# Altium PCB AT89S52继电器工控板.PCBDOC (part 2 of 2)
Units mm, origin at the board's own origin, x right, y up, seen from the top; angles counter-clockwise.
Board outline 172.85 x 146.43 mm, 2 copper layers (Top Layer, Bottom Layer); 86 components, 100 nets, 301 pads, 6 vias.
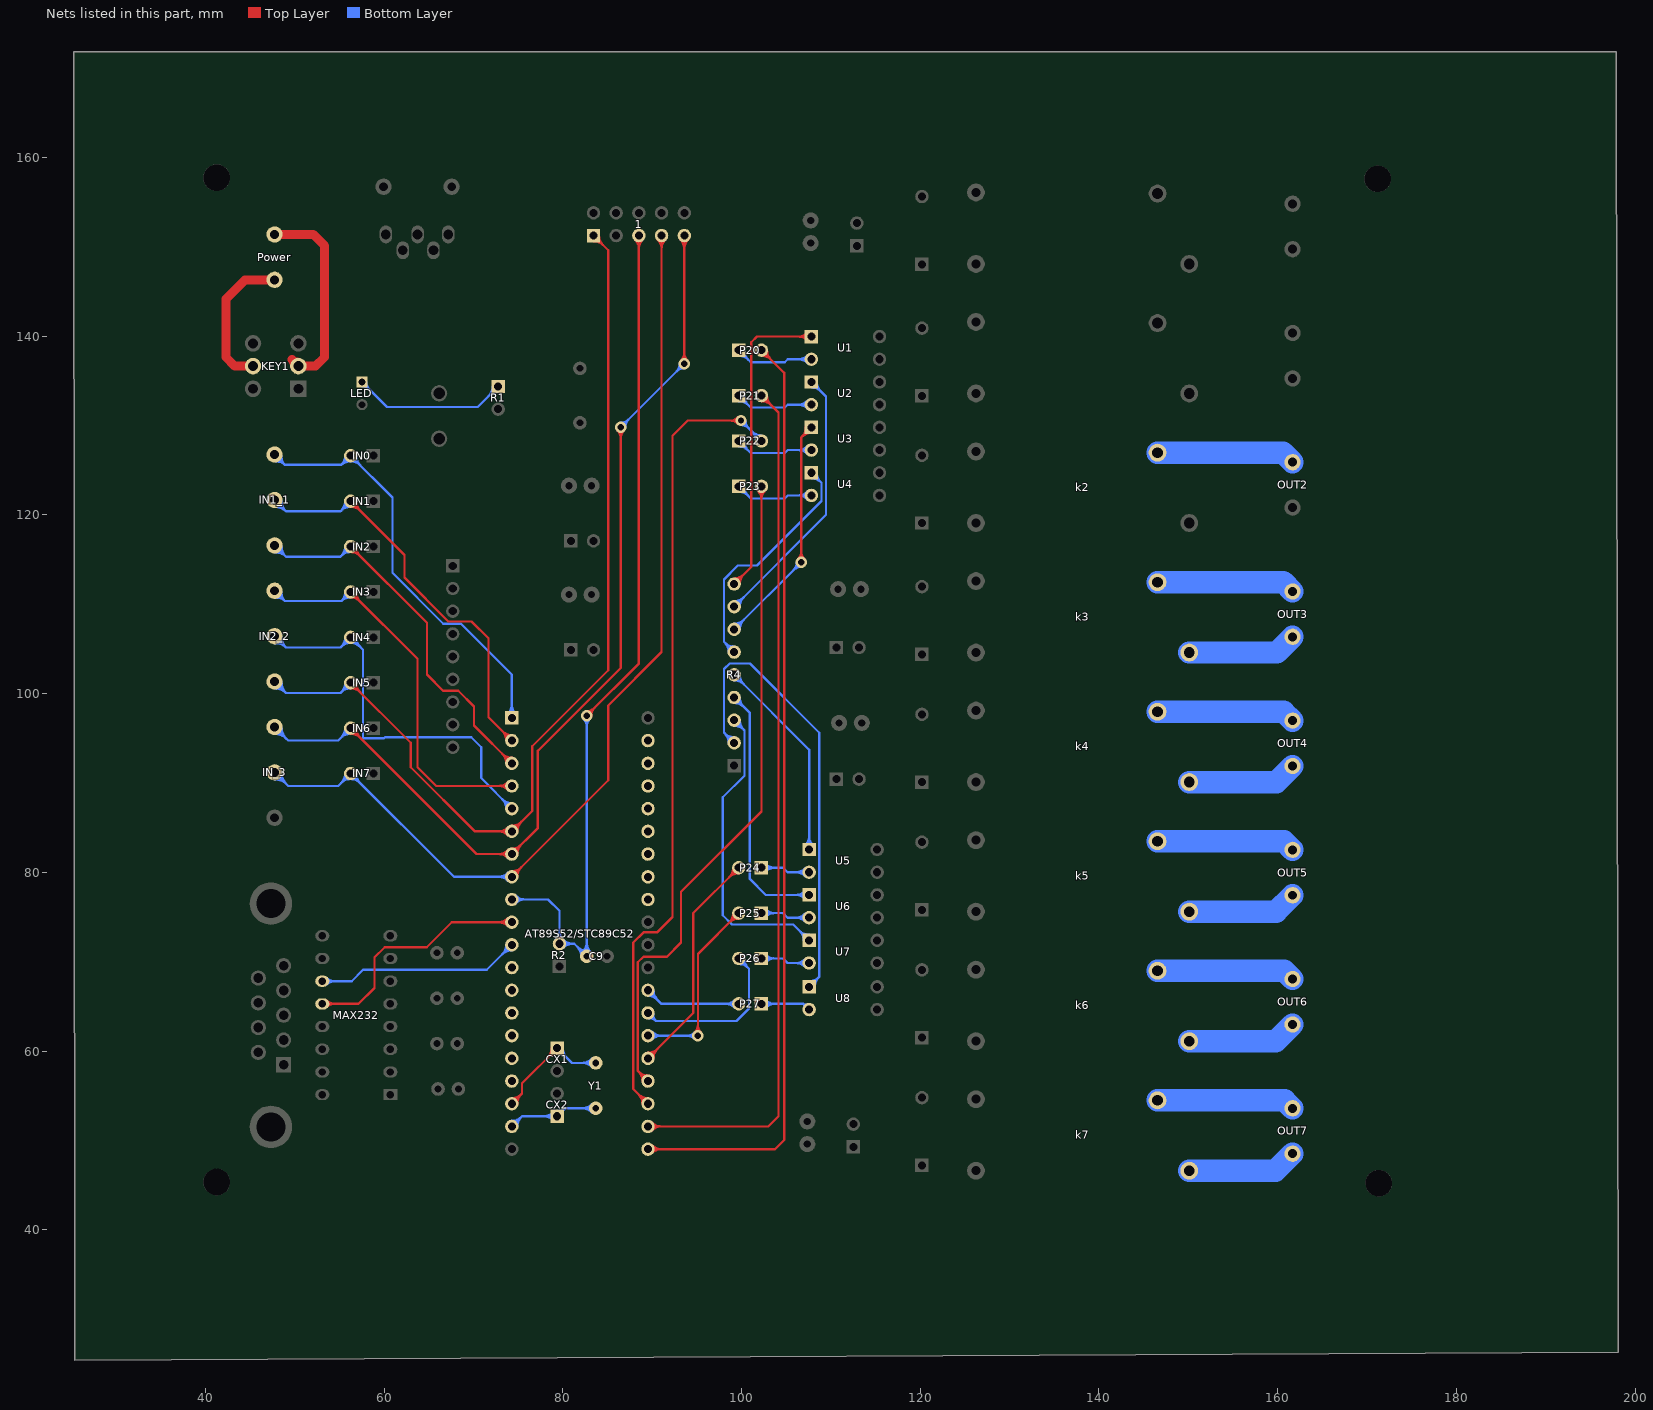
[diagram p2: the nets of this part, all layers, seen from the top]

## Via types
v1: diameter 1.27, hole 0.711, Top Layer to Bottom Layer, 6 vias

## Nets (pads, with @x,y where several pads share a name; then routed paths per layer and width w, separated by ;. In a path a pad name is that pad's centre, name@x,y a point inside that pad or via, vN(x,y) a via of type N, cw(c..) or ccw(c..) an arc to the next point about the centre after c; other vN are vias at no path point) (continued)
Netk2_4: k2.4 OUT2.2 | length 15.6
  Bottom Layer w2.5: k2.4@146.558,126.964 160.601,126.964 OUT2.2@161.671,125.893
Netk3_3: k3.3 OUT3.1 | length 12.3
  Bottom Layer w2.5: k3.3@150.114,104.594 159.911,104.594 OUT3.1@161.671,106.353
Netk3_4: k3.4 OUT3.2 | length 15.5
  Bottom Layer w2.5: k3.4@146.558,112.468 160.637,112.468 OUT3.2@161.671,111.433
Netk4_3: k4.3 OUT4.1 | length 12.3
  Bottom Layer w2.5: k4.3@150.114,90.097 159.875,90.097 OUT4.1@161.671,91.894
Netk4_4: k4.4 OUT4.2 | length 15.5
  Bottom Layer w2.5: k4.4@146.558,97.971 160.673,97.971 OUT4.2@161.671,96.974
Netk5_3: k5.3 OUT5.1 | length 12.3
  Bottom Layer w2.5: k5.3@150.114,75.601 159.839,75.601 OUT5.1@161.671,77.434
Netk5_4: k5.4 OUT5.2 | length 15.5
  Bottom Layer w2.5: k5.4@146.558,83.475 160.709,83.475 OUT5.2@161.671,82.514
Netk6_3: k6.3 OUT6.1 | length 12.3
  Bottom Layer w2.5: k6.3@150.114,61.105 159.802,61.105 OUT6.1@161.671,62.974
Netk6_4: k6.4 OUT6.2 | length 15.5
  Bottom Layer w2.5: k6.4@146.558,68.979 160.746,68.979 OUT6.2@161.671,68.054
Netk7_3: k7.3 OUT7.1 | length 12.3
  Bottom Layer w2.5: k7.3@150.114,46.609 159.766,46.609 OUT7.1@161.671,48.514
Netk7_4: k7.4 OUT7.2 | length 15.5
  Bottom Layer w2.5: k7.4@146.558,54.483 160.782,54.483 OUT7.2@161.671,53.594
NetKEY1_1: KEY1.1 Power.1 | length 23.5
  Top Layer w1: Power.1@47.752,151.384 52.07,151.384 53.34,150.114 53.34,137.668 52.324,136.652 KEY1.1@50.419,136.652 ; KEY1.1@49.994,136.652 ccw(c48.968,136.652) 49.693,137.378 ccw(c50.419,138.103) KEY1.1@50.419,137.077
NetKEY1_6: KEY1.5 Power.2 | length 16.3
  Top Layer w1: KEY1.5@45.339,136.652 43.307,136.652 42.291,137.668 42.291,144.145 44.45,146.304 Power.2@47.752,146.304
NetLED_1: LED.1 R1.1 | length 23
  Bottom Layer w0.254: LED.1@57.531,134.376 cw(c57.531,133.174) 58.381,134.024 cw(c59.231,134.874) LED.1@58.029,134.874 ; LED.1@57.531,134.874 60.325,132.08 70.485,132.08 R1.1@72.771,134.366 ; R1.1@72.148,134.366 cw(c70.644,134.366) 71.707,133.302 cw(c72.771,132.239) R1.1@72.771,133.743 ; R1.1@72.402,134.366 cw(c71.511,134.366) 72.141,133.736 cw(c72.771,133.106) R1.1@72.771,133.997
NetP20_1: P20.1 U1.2 | length 16.3
  Bottom Layer w0.254: P20.1@99.695,137.807 cw(c99.695,136.303) 100.759,137.366 cw(c101.822,138.43) P20.1@100.318,138.43 ; P20.1@99.695,138.061 cw(c99.695,137.17) 100.325,137.8 cw(c100.955,138.43) P20.1@100.064,138.43 ; P20.1@99.695,138.43 101.041,137.084 104.851,137.084 105.181,137.414 U1.2@107.823,137.414 ; U1.2@107.382,136.973 ccw(c106.319,135.91) 106.319,137.414 ccw(c106.319,138.918) U1.2@107.382,137.855 ; U1.2@107.562,137.153 ccw(c106.932,136.523) 106.932,137.414 ccw(c106.932,138.305) U1.2@107.562,137.675
NetP21_1: P21.1 U2.2 | length 16.3
  Bottom Layer w0.254: P21.1@99.695,132.727 cw(c99.695,131.223) 100.759,132.286 cw(c101.822,133.35) P21.1@100.318,133.35 ; P21.1@99.695,132.981 cw(c99.695,132.09) 100.325,132.72 cw(c100.955,133.35) P21.1@100.064,133.35 ; P21.1@99.695,133.35 101.041,132.004 104.851,132.004 105.181,132.334 U2.2@107.823,132.334 ; U2.2@107.382,131.893 ccw(c106.319,130.83) 106.319,132.334 ccw(c106.319,133.838) U2.2@107.382,132.775 ; U2.2@107.562,132.073 ccw(c106.932,131.443) 106.932,132.334 ccw(c106.932,133.225) U2.2@107.562,132.595
NetP22_1: P22.1 U3.2 | length 16.3
  Bottom Layer w0.254: P22.1@99.695,127.647 cw(c99.695,126.143) 100.759,127.206 cw(c101.822,128.27) P22.1@100.318,128.27 ; P22.1@99.695,127.901 cw(c99.695,127.01) 100.325,127.64 cw(c100.955,128.27) P22.1@100.064,128.27 ; P22.1@99.695,128.27 101.041,126.924 104.851,126.924 105.181,127.254 U3.2@107.823,127.254 ; U3.2@107.382,126.813 ccw(c106.319,125.75) 106.319,127.254 ccw(c106.319,128.758) U3.2@107.382,127.695 ; U3.2@107.562,126.993 ccw(c106.932,126.363) 106.932,127.254 ccw(c106.932,128.145) U3.2@107.562,127.515
NetP23_1: P23.1 U4.2 | length 16.3
  Bottom Layer w0.254: P23.1@99.695,122.567 cw(c99.695,121.063) 100.759,122.126 cw(c101.822,123.19) P23.1@100.318,123.19 ; P23.1@99.695,122.821 cw(c99.695,121.93) 100.325,122.56 cw(c100.955,123.19) P23.1@100.064,123.19 ; P23.1@99.695,123.19 101.041,121.844 104.851,121.844 105.181,122.174 U4.2@107.823,122.174 ; U4.2@107.382,121.733 ccw(c106.319,120.67) 106.319,122.174 ccw(c106.319,123.678) U4.2@107.382,122.615 ; U4.2@107.562,121.913 ccw(c106.932,121.283) 106.932,122.174 ccw(c106.932,123.065) U4.2@107.562,122.435
NetP24_1: P24.1 U5.2 | length 13.1
  Bottom Layer w0.254: P24.1@102.235,80.518 104.648,80.518 105.156,80.01 U5.2@107.569,80.01 ; P24.1@102.496,80.257 cw(c103.126,79.627) 103.126,80.518 cw(c103.126,81.409) P24.1@102.496,80.779 ; P24.1@102.676,80.077 cw(c103.739,79.014) 103.739,80.518 cw(c103.739,82.022) P24.1@102.676,80.959 ; U5.2@107.128,79.569 ccw(c106.065,78.506) 106.065,80.01 ccw(c106.065,81.514) U5.2@107.128,80.451 ; U5.2@107.308,79.749 ccw(c106.678,79.119) 106.678,80.01 ccw(c106.678,80.901) U5.2@107.308,80.271
NetP25_1: P25.1 U6.2 | length 13.1
  Bottom Layer w0.254: P25.1@102.235,75.438 104.648,75.438 105.156,74.93 U6.2@107.569,74.93 ; P25.1@102.496,75.177 cw(c103.126,74.547) 103.126,75.438 cw(c103.126,76.329) P25.1@102.496,75.699 ; P25.1@102.676,74.997 cw(c103.739,73.934) 103.739,75.438 cw(c103.739,76.942) P25.1@102.676,75.879 ; U6.2@107.128,74.489 ccw(c106.065,73.426) 106.065,74.93 ccw(c106.065,76.434) U6.2@107.128,75.371 ; U6.2@107.308,74.669 ccw(c106.678,74.039) 106.678,74.93 ccw(c106.678,75.821) U6.2@107.308,75.191
NetP26_1: P26.1 U7.2 | length 13.1
  Bottom Layer w0.254: P26.1@102.235,70.358 104.648,70.358 105.156,69.85 U7.2@107.569,69.85 ; P26.1@102.496,70.097 cw(c103.126,69.467) 103.126,70.358 cw(c103.126,71.249) P26.1@102.496,70.619 ; P26.1@102.676,69.917 cw(c103.739,68.854) 103.739,70.358 cw(c103.739,71.862) P26.1@102.676,70.799 ; U7.2@107.128,69.409 ccw(c106.065,68.346) 106.065,69.85 ccw(c106.065,71.354) U7.2@107.128,70.291 ; U7.2@107.308,69.589 ccw(c106.678,68.959) 106.678,69.85 ccw(c106.678,70.741) U7.2@107.308,70.111
NetP27_1: P27.1 U8.2 | length 10.2
  Bottom Layer w0.254: P27.1@102.235,65.278 106.934,65.278 ; P27.1@102.496,65.017 cw(c103.126,64.387) 103.126,65.278 cw(c103.126,66.169) P27.1@102.496,65.539 ; P27.1@102.676,64.837 cw(c103.739,63.774) 103.739,65.278 cw(c103.739,66.782) P27.1@102.676,65.719 ; U8.2@107.002,64.901 ccw(c106.697,65.041) 106.934,65.278 ; U8.2@107.311,65.21 cw(c107.171,65.515) 106.934,65.278 ; U8.2@107.569,64.643 106.934,65.278
P0.0: AT89S52/STC89C52.39
P0.1: AT89S52/STC89C52.38
P0.2: AT89S52/STC89C52.37
P0.3: AT89S52/STC89C52.36
P0.4: AT89S52/STC89C52.35
P0.5: AT89S52/STC89C52.34
P0.6: AT89S52/STC89C52.33
P0.7: AT89S52/STC89C52.32
P1.0: AT89S52/STC89C52.1 IN0.2 IN1_1.1 | length 62.3
  Bottom Layer w0.254: IN1_1.1@47.752,126.746 48.895,125.603 ; IN1_1.1@47.815,126.219 cw(c47.917,125.365) 48.525,125.973 cw(c49.133,126.581) IN1_1.1@48.279,126.683 ; IN1_1.1@47.845,125.967 cw(c47.996,124.704) 48.895,125.603 ; IN1_1.1@48.531,126.653 ccw(c49.794,126.502) 48.895,125.603 ; IN0.2@55.638,126.599 cw(c54.294,126.554) 55.245,125.603 ; IN0.2@55.892,126.607 cw(c55.096,126.581) 55.659,126.017 cw(c56.223,125.454) IN0.2@56.249,126.25 ; IN0.2@56.241,125.996 ccw(c56.196,124.652) 55.245,125.603 ; IN0.2@56.261,125.996 cw(c56.261,124.492) 57.325,125.555 cw(c58.388,126.619) IN0.2@56.884,126.619 ; IN0.2@56.261,126.25 cw(c56.261,125.359) 56.891,125.989 cw(c57.521,126.619) IN0.2@56.63,126.619 ; AT89S52/STC89C52.1@73.854,97.723 ccw(c72.791,98.786) 74.295,98.786 ccw(c75.799,98.786) AT89S52/STC89C52.1@74.736,97.723 ; AT89S52/STC89C52.1@74.034,97.543 ccw(c73.404,98.173) 74.295,98.173 ccw(c75.186,98.173) AT89S52/STC89C52.1@74.556,97.543 ; AT89S52/STC89C52.1@74.295,97.282 74.295,102.133 68.605,107.823 66.624,107.823 60.935,113.513 60.935,121.945 IN0.2@56.261,126.619 55.245,125.603 ; 48.895,125.603 55.245,125.603
P1.1: AT89S52/STC89C52.2 IN1.2 IN1_1.2 | length 61.2
  Top Layer w0.254: IN1.2@56.261,120.916 cw(c56.261,119.412) 57.325,120.475 cw(c58.388,121.539) IN1.2@56.884,121.539 ; IN1.2@56.261,121.17 cw(c56.261,120.279) 56.891,120.909 cw(c57.521,121.539) IN1.2@56.63,121.539 ; IN1.2@56.261,121.539 62.281,115.519 62.281,112.979 67.183,108.077 69.799,108.077 71.684,106.192 71.684,97.353 AT89S52/STC89C52.2@74.295,94.742 ; AT89S52/STC89C52.2@73.672,94.742 ccw(c72.168,94.742) 73.231,95.806 ccw(c74.295,96.869) AT89S52/STC89C52.2@74.295,95.365 ; AT89S52/STC89C52.2@73.926,94.742 ccw(c73.035,94.742) 73.665,95.372 ccw(c74.295,96.002) AT89S52/STC89C52.2@74.295,95.111
  Bottom Layer w0.254: IN1_1.2@47.752,121.666 49.022,120.396 ; IN1_1.2@47.773,121.135 cw(c47.816,120.012) 48.611,120.807 cw(c49.406,121.602) IN1_1.2@48.283,121.645 ; IN1_1.2@47.782,120.882 cw(c47.847,119.221) 49.022,120.396 ; IN1_1.2@48.536,121.636 ccw(c50.197,121.571) 49.022,120.396 ; IN1.2@55.638,121.539 cw(c54.134,121.539) 55.197,120.475 cw(c56.261,119.412) IN1.2@56.261,120.916 ; IN1.2@55.892,121.539 cw(c55.001,121.539) 55.631,120.909 cw(c56.261,120.279) IN1.2@56.261,121.17 ; IN1.2@56.261,121.539 55.118,120.396 49.022,120.396
P1.2: AT89S52/STC89C52.3 IN1_1.3 IN2.2 | length 58.1
  Top Layer w0.254: IN2.2@56.261,115.836 cw(c56.261,114.332) 57.325,115.395 cw(c58.388,116.459) IN2.2@56.884,116.459 ; IN2.2@56.261,116.09 cw(c56.261,115.199) 56.891,115.829 cw(c57.521,116.459) IN2.2@56.63,116.459 ; IN2.2@56.261,116.459 64.795,107.925 64.795,102.133 66.599,100.33 68.301,100.33 70.079,98.552 70.079,96.418 AT89S52/STC89C52.3@74.295,92.202 ; AT89S52/STC89C52.3@73.672,92.202 ccw(c72.168,92.202) 73.231,93.266 ccw(c74.295,94.329) AT89S52/STC89C52.3@74.295,92.825 ; AT89S52/STC89C52.3@73.926,92.202 ccw(c73.035,92.202) 73.665,92.832 ccw(c74.295,93.462) AT89S52/STC89C52.3@74.295,92.571
  Bottom Layer w0.254: IN1_1.3@47.752,116.586 49.022,115.316 ; IN1_1.3@47.773,116.055 cw(c47.816,114.932) 48.611,115.727 cw(c49.406,116.522) IN1_1.3@48.283,116.565 ; IN1_1.3@47.782,115.802 cw(c47.847,114.141) 49.022,115.316 ; IN1_1.3@48.536,116.556 ccw(c50.197,116.491) 49.022,115.316 ; IN2.2@55.638,116.459 cw(c54.134,116.459) 55.197,115.395 cw(c56.261,114.332) IN2.2@56.261,115.836 ; IN2.2@55.892,116.459 cw(c55.001,116.459) 55.631,115.829 cw(c56.261,115.199) IN2.2@56.261,116.09 ; IN2.2@56.261,116.459 55.118,115.316 49.022,115.316
P1.3: AT89S52/STC89C52.4 IN2_2.1 IN3.2 | length 58.4
  Top Layer w0.254: IN3.2@56.261,110.756 cw(c56.261,109.252) 57.325,110.315 cw(c58.388,111.379) IN3.2@56.884,111.379 ; IN3.2@56.261,111.01 cw(c56.261,110.119) 56.891,110.749 cw(c57.521,111.379) IN3.2@56.63,111.379 ; IN3.2@56.261,111.379 63.754,103.886 63.754,91.745 65.837,89.662 AT89S52/STC89C52.4@74.295,89.662 ; AT89S52/STC89C52.4@73.854,89.221 ccw(c72.791,88.158) 72.791,89.662 ccw(c72.791,91.166) AT89S52/STC89C52.4@73.854,90.103 ; AT89S52/STC89C52.4@74.034,89.401 ccw(c73.404,88.771) 73.404,89.662 ccw(c73.404,90.553) AT89S52/STC89C52.4@74.034,89.923
  Bottom Layer w0.254: IN2_2.1@47.752,111.506 48.895,110.363 ; IN2_2.1@47.815,110.979 cw(c47.917,110.125) 48.525,110.733 cw(c49.133,111.341) IN2_2.1@48.279,111.443 ; IN2_2.1@47.845,110.727 cw(c47.996,109.464) 48.895,110.363 ; IN2_2.1@48.531,111.413 ccw(c49.794,111.262) 48.895,110.363 ; IN3.2@55.638,111.359 cw(c54.294,111.314) 55.245,110.363 ; IN3.2@55.892,111.367 cw(c55.096,111.341) 55.659,110.777 cw(c56.223,110.214) IN3.2@56.249,111.01 ; IN3.2@56.241,110.756 ccw(c56.196,109.412) 55.245,110.363 ; IN3.2@56.261,111.379 55.245,110.363 ; 48.895,110.363 55.245,110.363
P1.4: AT89S52/STC89C52.5 IN2_2.2 IN4.2 | length 59.3
  Bottom Layer w0.254: IN2_2.2@47.752,106.426 49.022,105.156 ; IN2_2.2@47.773,105.895 cw(c47.816,104.772) 48.611,105.567 cw(c49.406,106.362) IN2_2.2@48.283,106.405 ; IN2_2.2@47.782,105.642 cw(c47.847,103.981) 49.022,105.156 ; IN2_2.2@48.536,106.396 ccw(c50.197,106.331) 49.022,105.156 ; IN4.2@55.638,106.299 cw(c54.134,106.299) 55.197,105.235 cw(c56.261,104.172) 56.261,105.676 cw(c56.261,104.172) 57.325,105.235 cw(c58.388,106.299) IN4.2@56.884,106.299 ; IN4.2@55.892,106.299 cw(c55.001,106.299) 55.631,105.669 cw(c56.261,105.039) 56.261,105.93 cw(c56.261,105.039) 56.891,105.669 cw(c57.521,106.299) IN4.2@56.63,106.299 ; AT89S52/STC89C52.5@73.672,87.122 ccw(c72.168,87.122) 73.231,88.186 ccw(c74.295,89.249) AT89S52/STC89C52.5@74.295,87.745 ; AT89S52/STC89C52.5@73.926,87.122 ccw(c73.035,87.122) 73.665,87.752 ccw(c74.295,88.382) AT89S52/STC89C52.5@74.295,87.491 ; AT89S52/STC89C52.5@74.295,87.122 70.866,90.551 70.866,94.005 69.748,95.123 60.122,95.123 59.995,94.996 57.658,94.996 57.658,104.902 IN4.2@56.261,106.299 55.118,105.156 49.022,105.156
P1.5: 1.1 AT89S52/STC89C52.6 IN2_2.3 IN5.2 | length 131.3
  Top Layer w0.254: IN5.2@56.261,100.596 cw(c56.261,99.092) 57.325,100.155 cw(c58.388,101.219) IN5.2@56.884,101.219 ; IN5.2@56.261,100.85 cw(c56.261,99.959) 56.891,100.589 cw(c57.521,101.219) IN5.2@56.63,101.219 ; IN5.2@56.261,101.219 62.992,94.488 62.992,91.77 70.18,84.582 AT89S52/STC89C52.6@74.295,84.582 76.581,86.868 76.581,94.107 85.09,102.616 85.09,149.606 1.1@83.439,151.257 ; AT89S52/STC89C52.6@73.854,84.141 ccw(c72.791,83.078) 72.791,84.582 ccw(c72.791,86.086) AT89S52/STC89C52.6@73.854,85.023 ; AT89S52/STC89C52.6@74.034,84.321 ccw(c73.404,83.691) 73.404,84.582 ccw(c73.404,85.473) AT89S52/STC89C52.6@74.034,84.843 ; AT89S52/STC89C52.6@74.295,84.951 ccw(c74.295,85.842) 74.925,85.212 ccw(c75.555,84.582) AT89S52/STC89C52.6@74.664,84.582 ; AT89S52/STC89C52.6@74.295,85.205 ccw(c74.295,86.709) 75.359,85.646 ccw(c76.422,84.582) AT89S52/STC89C52.6@74.918,84.582 ; 1.1@83.439,150.634 cw(c83.439,149.13) 84.503,150.193 cw(c85.566,151.257) 1.1@84.062,151.257 ; 1.1@83.439,150.888 cw(c83.439,149.997) 84.069,150.627 cw(c84.699,151.257) 1.1@83.808,151.257
  Bottom Layer w0.254: IN2_2.3@47.752,101.346 49.022,100.076 ; IN2_2.3@47.773,100.815 cw(c47.816,99.692) 48.611,100.487 cw(c49.406,101.282) IN2_2.3@48.283,101.325 ; IN2_2.3@47.782,100.562 cw(c47.847,98.901) 49.022,100.076 ; IN2_2.3@48.536,101.316 ccw(c50.197,101.251) 49.022,100.076 ; IN5.2@55.638,101.219 cw(c54.134,101.219) 55.197,100.155 cw(c56.261,99.092) IN5.2@56.261,100.596 ; IN5.2@55.892,101.219 cw(c55.001,101.219) 55.631,100.589 cw(c56.261,99.959) IN5.2@56.261,100.85 ; IN5.2@56.261,101.219 55.118,100.076 49.022,100.076
P1.6: 1.9 AT89S52/STC89C52.7 IN6.2 IN_3.1 | length 142.3
  Top Layer w0.254: IN6.2@56.261,95.516 cw(c56.261,94.012) 57.325,95.075 cw(c58.388,96.139) IN6.2@56.884,96.139 ; IN6.2@56.261,95.77 cw(c56.261,94.879) 56.891,95.509 cw(c57.521,96.139) IN6.2@56.63,96.139 ; IN6.2@56.261,96.139 70.358,82.042 AT89S52/STC89C52.7@74.295,82.042 77.216,84.963 77.216,93.599 86.487,102.87 v1(86.487,129.794) ; AT89S52/STC89C52.7@73.854,81.601 ccw(c72.791,80.538) 72.791,82.042 ccw(c72.791,83.546) AT89S52/STC89C52.7@73.854,82.483 ; AT89S52/STC89C52.7@74.034,81.781 ccw(c73.404,81.151) 73.404,82.042 ccw(c73.404,82.933) AT89S52/STC89C52.7@74.034,82.303 ; AT89S52/STC89C52.7@74.295,82.411 ccw(c74.295,83.302) 74.925,82.672 ccw(c75.555,82.042) AT89S52/STC89C52.7@74.664,82.042 ; AT89S52/STC89C52.7@74.295,82.665 ccw(c74.295,84.169) 75.359,83.106 ccw(c76.422,82.042) AT89S52/STC89C52.7@74.918,82.042 ; v1@86.128,129.435 cw(c85.261,128.568) 86.487,128.568 cw(c87.713,128.568) v1@86.846,129.435 ; 1.9@93.158,150.816 cw(c92.095,149.753) 93.599,149.753 cw(c95.103,149.753) 1.9@94.04,150.816 ; v1@93.24,137.265 ccw(c92.373,138.132) 93.599,138.132 ccw(c94.825,138.132) v1@93.958,137.265 ; 1.9@93.338,150.996 cw(c92.708,150.366) 93.599,150.366 cw(c94.49,150.366) 1.9@93.86,150.996 ; v1(93.599,136.906) 1.9@93.599,151.257
  Bottom Layer w0.254: IN_3.1@47.752,95.481 cw(c47.752,93.586) 49.092,94.926 cw(c50.432,96.266) IN_3.1@48.537,96.266 ; IN_3.1@47.752,95.735 cw(c47.752,94.453) 48.658,95.36 cw(c49.565,96.266) IN_3.1@48.283,96.266 ; IN_3.1@47.752,96.266 49.276,94.742 54.864,94.742 IN6.2@56.261,96.139 ; IN6.2@55.638,96.139 cw(c54.134,96.139) 55.197,95.075 cw(c56.261,94.012) IN6.2@56.261,95.516 ; IN6.2@55.892,96.139 cw(c55.001,96.139) 55.631,95.509 cw(c56.261,94.879) IN6.2@56.261,95.77 ; v1(86.487,129.794) v1(93.599,136.906) ; v1@86.487,130.302 ccw(c86.487,131.528) 87.354,130.661 ccw(c88.221,129.794) v1@86.995,129.794 ; v1@93.091,136.906 cw(c91.865,136.906) 92.732,136.039 cw(c93.599,135.172) v1@93.599,136.398
P1.7: 1.7 AT89S52/STC89C52.8 IN7.2 IN_3.2 | length 135
  Top Layer w0.254: AT89S52/STC89C52.8@74.295,79.502 85.09,90.297 85.09,98.679 91.059,104.648 1.7@91.059,151.257 ; AT89S52/STC89C52.8@74.295,79.871 ccw(c74.295,80.762) 74.925,80.132 ccw(c75.555,79.502) AT89S52/STC89C52.8@74.664,79.502 ; AT89S52/STC89C52.8@74.295,80.125 ccw(c74.295,81.629) 75.359,80.566 ccw(c76.422,79.502) AT89S52/STC89C52.8@74.918,79.502 ; 1.7@90.618,150.816 cw(c89.555,149.753) 91.059,149.753 cw(c92.563,149.753) 1.7@91.5,150.816 ; 1.7@90.798,150.996 cw(c90.168,150.366) 91.059,150.366 cw(c91.95,150.366) 1.7@91.32,150.996
  Bottom Layer w0.254: IN_3.2@47.752,90.401 cw(c47.752,88.506) 49.092,89.846 cw(c50.432,91.186) IN_3.2@48.537,91.186 ; IN_3.2@47.752,90.655 cw(c47.752,89.373) 48.658,90.28 cw(c49.565,91.186) IN_3.2@48.283,91.186 ; IN_3.2@47.752,91.186 49.276,89.662 54.864,89.662 IN7.2@56.261,91.059 67.818,79.502 AT89S52/STC89C52.8@74.295,79.502 ; IN7.2@55.638,91.059 cw(c54.134,91.059) 55.197,89.995 cw(c56.261,88.932) 56.261,90.436 cw(c56.261,88.932) 57.325,89.995 cw(c58.388,91.059) IN7.2@56.884,91.059 ; IN7.2@55.892,91.059 cw(c55.001,91.059) 55.631,90.429 cw(c56.261,89.799) 56.261,90.69 cw(c56.261,89.799) 56.891,90.429 cw(c57.521,91.059) IN7.2@56.63,91.059 ; AT89S52/STC89C52.8@73.854,79.061 ccw(c72.791,77.998) 72.791,79.502 ccw(c72.791,81.006) AT89S52/STC89C52.8@73.854,79.943 ; AT89S52/STC89C52.8@74.034,79.241 ccw(c73.404,78.611) 73.404,79.502 ccw(c73.404,80.393) AT89S52/STC89C52.8@74.034,79.763
P2.0: AT89S52/STC89C52.21 P20.2 | length 112.6
  Top Layer w0.254: AT89S52/STC89C52.21@89.535,49.022 103.759,49.022 104.775,50.038 104.775,135.89 P20.2@102.235,138.43 ; AT89S52/STC89C52.21@89.796,48.761 cw(c90.426,48.131) 90.426,49.022 cw(c90.426,49.913) AT89S52/STC89C52.21@89.796,49.283 ; AT89S52/STC89C52.21@89.976,48.581 cw(c91.039,47.518) 91.039,49.022 cw(c91.039,50.526) AT89S52/STC89C52.21@89.976,49.463 ; P20.2@102.235,137.807 cw(c102.235,136.303) 103.299,137.366 cw(c104.362,138.43) P20.2@102.858,138.43 ; P20.2@102.235,138.061 cw(c102.235,137.17) 102.865,137.8 cw(c103.495,138.43) P20.2@102.604,138.43
P2.1: AT89S52/STC89C52.22 P21.2 | length 104
  Top Layer w0.254: AT89S52/STC89C52.22@89.535,51.562 102.997,51.562 104.14,52.705 104.14,131.445 P21.2@102.235,133.35 ; AT89S52/STC89C52.22@89.796,51.301 cw(c90.426,50.671) 90.426,51.562 cw(c90.426,52.453) AT89S52/STC89C52.22@89.796,51.823 ; AT89S52/STC89C52.22@89.976,51.121 cw(c91.039,50.058) 91.039,51.562 cw(c91.039,53.066) AT89S52/STC89C52.22@89.976,52.003 ; P21.2@102.235,132.727 cw(c102.235,131.223) 103.299,132.286 cw(c104.362,133.35) P21.2@102.858,133.35 ; P21.2@102.235,132.981 cw(c102.235,132.09) 102.865,132.72 cw(c103.495,133.35) P21.2@102.604,133.35
P2.2: AT89S52/STC89C52.23 P22.2 | length 101.1
  Top Layer w0.254: AT89S52/STC89C52.23@88.912,54.102 ccw(c87.408,54.102) 88.471,55.166 ccw(c89.535,56.229) AT89S52/STC89C52.23@89.535,54.725 ; AT89S52/STC89C52.23@89.166,54.102 ccw(c88.275,54.102) 88.905,54.732 ccw(c89.535,55.362) AT89S52/STC89C52.23@89.535,54.471 ; AT89S52/STC89C52.23@89.535,54.102 87.884,55.753 87.884,72.136 89.027,73.279 90.551,73.279 92.278,75.006 92.278,128.854 93.98,130.556 v1(99.949,130.556) ; v1@99.59,130.197 ccw(c98.723,129.33) 98.723,130.556 ccw(c98.723,131.782) v1@99.59,130.915
  Bottom Layer w0.254: v1@99.949,130.048 cw(c99.949,128.822) 100.816,129.689 cw(c101.683,130.556) v1@100.457,130.556 ; v1(99.949,130.556) P22.2@102.235,128.27 ; P22.2@101.612,128.27 ccw(c100.108,128.27) 101.171,129.334 ccw(c102.235,130.397) P22.2@102.235,128.893 ; P22.2@101.866,128.27 ccw(c100.975,128.27) 101.605,128.9 ccw(c102.235,129.53) P22.2@102.235,128.639
P2.3: AT89S52/STC89C52.24 P23.2 | length 81.8
  Top Layer w0.254: AT89S52/STC89C52.24@88.912,56.642 ccw(c87.408,56.642) 88.471,57.706 ccw(c89.535,58.769) AT89S52/STC89C52.24@89.535,57.265 ; AT89S52/STC89C52.24@89.166,56.642 ccw(c88.275,56.642) 88.905,57.272 ccw(c89.535,57.902) AT89S52/STC89C52.24@89.535,57.011 ; AT89S52/STC89C52.24@89.535,56.642 88.392,57.785 88.392,69.926 89.027,70.561 91.669,70.561 93.243,72.136 93.243,77.826 102.235,86.817 P23.2@102.235,123.19 ; P23.2@101.794,122.749 cw(c100.731,121.686) 102.235,121.686 cw(c103.739,121.686) P23.2@102.676,122.749 ; P23.2@101.974,122.929 cw(c101.344,122.299) 102.235,122.299 cw(c103.126,122.299) P23.2@102.496,122.929
P2.4: AT89S52/STC89C52.25 P24.2 | length 33.1
  Top Layer w0.254: AT89S52/STC89C52.25@89.535,59.182 94.615,64.262 94.615,75.438 P24.2@99.695,80.518 ; AT89S52/STC89C52.25@89.535,59.551 ccw(c89.535,60.442) 90.165,59.812 ccw(c90.795,59.182) AT89S52/STC89C52.25@89.904,59.182 ; AT89S52/STC89C52.25@89.535,59.805 ccw(c89.535,61.309) 90.599,60.246 ccw(c91.662,59.182) AT89S52/STC89C52.25@90.158,59.182 ; P24.2@99.072,80.518 cw(c97.568,80.518) 98.631,79.454 cw(c99.695,78.391) P24.2@99.695,79.895 ; P24.2@99.326,80.518 cw(c98.435,80.518) 99.065,79.888 cw(c99.695,79.258) P24.2@99.695,80.149
P2.5: AT89S52/STC89C52.26 P25.2 | length 32.6
  Top Layer w0.254: v1@94.764,62.081 ccw(c93.897,62.948) 95.123,62.948 ccw(c96.349,62.948) v1@95.482,62.081 ; v1(95.123,61.722) 95.123,70.866 P25.2@99.695,75.438 ; P25.2@99.072,75.438 cw(c97.568,75.438) 98.631,74.374 cw(c99.695,73.311) P25.2@99.695,74.815 ; P25.2@99.326,75.438 cw(c98.435,75.438) 99.065,74.808 cw(c99.695,74.178) P25.2@99.695,75.069
  Bottom Layer w0.254: AT89S52/STC89C52.26@89.535,61.722 v1(95.123,61.722) ; AT89S52/STC89C52.26@89.796,61.461 cw(c90.426,60.831) 90.426,61.722 cw(c90.426,62.613) AT89S52/STC89C52.26@89.796,61.983 ; AT89S52/STC89C52.26@89.976,61.281 cw(c91.039,60.218) 91.039,61.722 cw(c91.039,63.226) AT89S52/STC89C52.26@89.976,62.163 ; v1@94.764,61.363 ccw(c93.897,60.496) 93.897,61.722 ccw(c93.897,62.948) v1@94.764,62.081
P2.6: AT89S52/STC89C52.27 P26.2 | length 23.8
  Bottom Layer w0.254: AT89S52/STC89C52.27@89.535,64.262 90.424,63.373 ; AT89S52/STC89C52.27@89.619,63.645 cw(c89.747,62.696) 90.424,63.373 ; AT89S52/STC89C52.27@90.152,64.178 ccw(c91.101,64.05) 90.424,63.373 ; P26.2@99.695,69.735 cw(c99.695,68.231) 100.759,69.294 cw(c101.822,70.358) P26.2@100.318,70.358 ; P26.2@99.695,69.989 cw(c99.695,69.098) 100.325,69.728 cw(c100.955,70.358) P26.2@100.064,70.358 ; P26.2@99.695,70.358 100.838,69.215 100.838,64.77 99.441,63.373 90.424,63.373
P2.7: AT89S52/STC89C52.28 P27.2 | length 18.3
  Bottom Layer w0.254: AT89S52/STC89C52.28@89.535,66.179 cw(c89.535,64.675) 90.599,65.738 cw(c91.662,66.802) AT89S52/STC89C52.28@90.158,66.802 ; AT89S52/STC89C52.28@89.535,66.433 cw(c89.535,65.542) 90.165,66.172 cw(c90.795,66.802) AT89S52/STC89C52.28@89.904,66.802 ; AT89S52/STC89C52.28@89.535,66.802 91.059,65.278 P27.2@99.695,65.278 ; P27.2@99.254,64.837 ccw(c98.191,63.774) 98.191,65.278 ccw(c98.191,66.782) P27.2@99.254,65.719 ; P27.2@99.434,65.017 ccw(c98.804,64.387) 98.804,65.278 ccw(c98.804,66.169) P27.2@99.434,65.539
P3.0: AT89S52/STC89C52.10 MAX232.12 | length 32.7
  Top Layer w0.254: MAX232.12@53.09,65.279 57.151,65.279 58.928,67.056 58.928,70.485 60.071,71.628 64.77,71.628 67.564,74.422 AT89S52/STC89C52.10@74.295,74.422 ; MAX232.12@53.604,64.927 cw(c54.454,64.077) 54.454,65.279 cw(c54.454,66.481) MAX232.12@53.604,65.631 ; AT89S52/STC89C52.10@73.854,73.981 ccw(c72.791,72.918) 72.791,74.422 ccw(c72.791,75.926) AT89S52/STC89C52.10@73.854,74.863 ; AT89S52/STC89C52.10@74.034,74.161 ccw(c73.404,73.531) 73.404,74.422 ccw(c73.404,75.313) AT89S52/STC89C52.10@74.034,74.683
P3.1: AT89S52/STC89C52.11 MAX232.11 | length 28.5
  Bottom Layer w0.254: MAX232.11@53.09,67.819 56.389,67.819 57.658,69.088 71.501,69.088 AT89S52/STC89C52.11@74.295,71.882 ; MAX232.11@53.604,67.467 cw(c54.454,66.617) 54.454,67.819 cw(c54.454,69.021) MAX232.11@53.604,68.171 ; AT89S52/STC89C52.11@73.672,71.882 cw(c72.168,71.882) 73.231,70.818 cw(c74.295,69.755) AT89S52/STC89C52.11@74.295,71.259 ; AT89S52/STC89C52.11@73.926,71.882 cw(c73.035,71.882) 73.665,71.252 cw(c74.295,70.622) AT89S52/STC89C52.11@74.295,71.513
P3.2: AT89S52/STC89C52.12
P3.3: AT89S52/STC89C52.13
P3.4: AT89S52/STC89C52.14
P3.5: AT89S52/STC89C52.15
P3.6: AT89S52/STC89C52.16
P3.7: AT89S52/STC89C52.17
Q1: R4.9 U1.1 | length 42.4
  Top Layer w0.254: R4.9@99.187,112.268 101.092,114.173 101.092,139.319 101.727,139.954 U1.1@107.823,139.954 ; R4.9@99.187,112.637 ccw(c99.187,113.528) 99.817,112.898 ccw(c100.447,112.268) R4.9@99.556,112.268 ; R4.9@99.187,112.891 ccw(c99.187,114.395) 100.251,113.332 ccw(c101.314,112.268) R4.9@99.81,112.268 ; U1.1@107.382,139.513 ccw(c106.319,138.45) 106.319,139.954 ccw(c106.319,141.458) U1.1@107.382,140.395 ; U1.1@107.562,139.693 ccw(c106.932,139.063) 106.932,139.954 ccw(c106.932,140.845) U1.1@107.562,140.215
Q2: R4.8 U2.1 | length 37.6
  Bottom Layer w0.254: R4.8@99.187,109.728 109.462,120.003 109.462,133.235 U2.1@107.823,134.874 ; R4.8@99.187,110.097 ccw(c99.187,110.988) 99.817,110.358 ccw(c100.447,109.728) R4.8@99.556,109.728 ; R4.8@99.187,110.351 ccw(c99.187,111.855) 100.251,110.792 ccw(c101.314,109.728) R4.8@99.81,109.728 ; U2.1@107.823,134.251 cw(c107.823,132.747) 108.887,133.81 cw(c109.95,134.874) U2.1@108.446,134.874 ; U2.1@107.823,134.505 cw(c107.823,133.614) 108.453,134.244 cw(c109.083,134.874) U2.1@108.192,134.874
Q3: R4.7 U3.1 | length 37.6
  Top Layer w0.254: v1@106.321,115.04 ccw(c105.454,115.907) 106.68,115.907 ccw(c107.906,115.907) v1@107.039,115.04 ; v1(106.68,114.681) 106.68,128.651 U3.1@107.823,129.794 ; U3.1@107.2,129.794 cw(c105.696,129.794) 106.759,128.73 cw(c107.823,127.667) U3.1@107.823,129.171 ; U3.1@107.454,129.794 cw(c106.563,129.794) 107.193,129.164 cw(c107.823,128.534) U3.1@107.823,129.425
  Bottom Layer w0.254: R4.7@99.187,107.188 v1(106.68,114.681) ; R4.7@99.187,107.557 ccw(c99.187,108.448) 99.817,107.818 ccw(c100.447,107.188) R4.7@99.556,107.188 ; R4.7@99.187,107.811 ccw(c99.187,109.315) 100.251,108.252 ccw(c101.314,107.188) R4.7@99.81,107.188 ; v1@106.172,114.681 cw(c104.946,114.681) 105.813,113.814 cw(c106.68,112.947) v1@106.68,114.173
Q4: R4.6 U4.1 | length 34.3
  Bottom Layer w0.254: R4.6@98.564,104.648 ccw(c97.06,104.648) 98.123,105.712 ccw(c99.187,106.775) R4.6@99.187,105.271 ; R4.6@98.818,104.648 ccw(c97.927,104.648) 98.557,105.278 ccw(c99.187,105.908) R4.6@99.187,105.017 ; R4.6@99.187,104.648 98.044,105.791 98.044,112.776 99.593,114.325 101.727,114.325 108.954,121.552 108.954,123.583 U4.1@107.823,124.714 ; U4.1@107.823,124.091 cw(c107.823,122.587) 108.887,123.65 cw(c109.95,124.714) U4.1@108.446,124.714 ; U4.1@107.823,124.345 cw(c107.823,123.454) 108.453,124.084 cw(c109.083,124.714) U4.1@108.192,124.714
Q5: R4.5 U5.1 | length 30.6
  Bottom Layer w0.254: R4.5@99.187,101.485 cw(c99.187,99.981) 100.251,101.044 cw(c101.314,102.108) R4.5@99.81,102.108 ; R4.5@99.187,101.739 cw(c99.187,100.848) 99.817,101.478 cw(c100.447,102.108) R4.5@99.556,102.108 ; R4.5@99.187,102.108 107.569,93.726 U5.1@107.569,82.55 ; U5.1@107.128,82.991 ccw(c106.065,84.054) 107.569,84.054 ccw(c109.073,84.054) U5.1@108.01,82.991 ; U5.1@107.308,82.811 ccw(c106.678,83.441) 107.569,83.441 ccw(c108.46,83.441) U5.1@107.83,82.811
Q6: R4.4 U6.1 | length 35.9
  Bottom Layer w0.254: R4.4@99.187,98.945 cw(c99.187,97.441) 100.251,98.504 cw(c101.314,99.568) R4.4@99.81,99.568 ; R4.4@99.187,99.199 cw(c99.187,98.308) 99.817,98.938 cw(c100.447,99.568) R4.4@99.556,99.568 ; R4.4@99.187,99.568 100.94,97.815 100.94,79.248 102.718,77.47 U6.1@107.569,77.47 ; U6.1@107.128,77.029 ccw(c106.065,75.966) 106.065,77.47 ccw(c106.065,78.974) U6.1@107.128,77.911 ; U6.1@107.308,77.209 ccw(c106.678,76.579) 106.678,77.47 ccw(c106.678,78.361) U6.1@107.308,77.731
Q7: R4.3 U7.1 | length 41.7
  Bottom Layer w0.254: R4.3@99.187,96.405 cw(c99.187,94.901) 100.251,95.964 cw(c101.314,97.028) R4.3@99.81,97.028 ; R4.3@99.187,96.659 cw(c99.187,95.768) 99.817,96.398 cw(c100.447,97.028) R4.3@99.556,97.028 ; R4.3@99.187,97.028 100.33,95.885 100.33,90.805 97.917,88.392 97.917,75.184 98.933,74.168 105.791,74.168 U7.1@107.569,72.39 ; U7.1@106.946,72.39 ccw(c105.442,72.39) 106.505,73.454 ccw(c107.569,74.517) U7.1@107.569,73.013 ; U7.1@107.2,72.39 ccw(c106.309,72.39) 106.939,73.02 ccw(c107.569,73.65) U7.1@107.569,72.759
Q8: R4.2 U8.1 | length 59.3
  Bottom Layer w0.254: R4.2@98.564,94.488 ccw(c97.06,94.488) 98.123,95.552 ccw(c99.187,96.615) R4.2@99.187,95.111 ; R4.2@98.818,94.488 ccw(c97.927,94.488) 98.557,95.118 ccw(c99.187,95.748) R4.2@99.187,94.857 ; R4.2@99.187,94.488 98.044,95.631 98.044,102.743 98.679,103.378 100.965,103.378 108.712,95.631 108.712,68.326 U8.1@107.569,67.183 ; U8.1@107.569,67.552 ccw(c107.569,68.443) 108.199,67.813 ccw(c108.829,67.183) U8.1@107.938,67.183 ; U8.1@107.569,67.806 ccw(c107.569,69.31) 108.633,68.247 ccw(c109.696,67.183) U8.1@108.192,67.183
RESRT: 1.5 AT89S52/STC89C52.9 C9.2 R2.2 | length 122.8
  Top Layer w0.254: v1(82.677,97.536) 88.519,103.378 1.5@88.519,151.257 ; v1@82.677,98.044 ccw(c82.677,99.27) 83.544,98.403 ccw(c84.411,97.536) v1@83.185,97.536 ; 1.5@88.078,150.816 cw(c87.015,149.753) 88.519,149.753 cw(c90.023,149.753) 1.5@88.96,150.816 ; 1.5@88.258,150.996 cw(c87.628,150.366) 88.519,150.366 cw(c89.41,150.366) 1.5@88.78,150.996
  Bottom Layer w0.254: AT89S52/STC89C52.9@74.295,76.962 78.359,76.962 79.629,75.692 R2.2@79.629,72.009 81.28,72.009 C9.2@82.677,70.612 v1(82.677,97.536) ; AT89S52/STC89C52.9@74.556,76.701 cw(c75.186,76.071) 75.186,76.962 cw(c75.186,77.853) AT89S52/STC89C52.9@74.556,77.223 ; AT89S52/STC89C52.9@74.736,76.521 cw(c75.799,75.458) 75.799,76.962 cw(c75.799,78.466) AT89S52/STC89C52.9@74.736,77.403 ; R2.2@79.188,72.45 ccw(c78.125,73.513) 79.629,73.513 ccw(c81.133,73.513) 80.07,72.45 ccw(c81.133,73.513) 81.133,72.009 ccw(c81.133,70.505) R2.2@80.07,71.568 ; R2.2@79.368,72.27 ccw(c78.738,72.9) 79.629,72.9 ccw(c80.52,72.9) 79.89,72.27 ccw(c80.52,72.9) 80.52,72.009 ccw(c80.52,71.118) R2.2@79.89,71.748 ; C9.2@82.042,70.612 ccw(c80.509,70.612) 81.593,71.696 ccw(c82.677,72.78) C9.2@82.677,71.247 ; C9.2@82.228,71.061 ccw(c81.144,72.145) 82.677,72.145 ccw(c84.21,72.145) C9.2@83.126,71.061 ; C9.2@82.296,70.612 ccw(c81.376,70.612) 82.027,71.262 ccw(c82.677,71.913) C9.2@82.677,70.993 ; v1@82.318,97.177 cw(c81.451,96.31) 82.677,96.31 cw(c83.903,96.31) v1@83.036,97.177 ; C9.2@82.408,70.881 ccw(c81.757,71.532) 82.677,71.532 ccw(c83.597,71.532) C9.2@82.946,70.881
VCC: 
XTAL1: AT89S52/STC89C52.19 CX2.1 Y1.1 | length 23.4
  Bottom Layer w0.254: AT89S52/STC89C52.19@74.295,51.562 75.438,52.705 CX2.1@79.375,52.705 80.264,53.594 ; AT89S52/STC89C52.19@74.295,51.931 ccw(c74.295,52.822) 74.925,52.192 ccw(c75.555,51.562) AT89S52/STC89C52.19@74.664,51.562 ; AT89S52/STC89C52.19@74.295,52.185 ccw(c74.295,53.689) 75.359,52.626 ccw(c76.422,51.562) AT89S52/STC89C52.19@74.918,51.562 ; CX2.1@78.934,52.264 ccw(c77.871,51.201) 77.871,52.705 ccw(c77.871,54.209) CX2.1@78.934,53.146 ; CX2.1@79.114,52.444 ccw(c78.484,51.814) 78.484,52.705 ccw(c78.484,53.596) CX2.1@79.114,52.966 ; CX2.1@79.459,53.322 ccw(c79.587,54.271) 80.264,53.594 ; CX2.1@79.992,52.789 cw(c80.941,52.917) 80.264,53.594 ; Y1.1@83.244,53.145 ccw(c82.16,52.061) 82.16,53.594 ccw(c82.16,55.127) Y1.1@83.244,54.043 ; Y1.1@83.424,53.325 ccw(c82.773,52.674) 82.773,53.594 ccw(c82.773,54.514) Y1.1@83.424,53.863 ; Y1.1@83.693,53.594 80.264,53.594
XTAL2: AT89S52/STC89C52.18 CX1.1 Y1.2 | length 28.5
  Top Layer w0.254: AT89S52/STC89C52.18@74.295,54.102 75.438,55.245 75.438,56.388 CX1.1@79.375,60.325 ; AT89S52/STC89C52.18@74.295,54.471 ccw(c74.295,55.362) 74.925,54.732 ccw(c75.555,54.102) AT89S52/STC89C52.18@74.664,54.102 ; AT89S52/STC89C52.18@74.295,54.725 ccw(c74.295,56.229) 75.359,55.166 ccw(c76.422,54.102) AT89S52/STC89C52.18@74.918,54.102 ; CX1.1@78.752,60.325 cw(c77.248,60.325) 78.311,59.261 cw(c79.375,58.198) CX1.1@79.375,59.702 ; CX1.1@79.006,60.325 cw(c78.115,60.325) 78.745,59.695 cw(c79.375,59.065) CX1.1@79.375,59.956
  Bottom Layer w0.254: CX1.1@79.375,59.702 cw(c79.375,58.198) 80.439,59.261 cw(c81.502,60.325) CX1.1@79.998,60.325 ; CX1.1@79.375,59.956 cw(c79.375,59.065) 80.005,59.695 cw(c80.635,60.325) CX1.1@79.744,60.325 ; CX1.1@79.375,60.325 81.026,58.674 Y1.2@83.693,58.674 ; Y1.2@83.244,58.225 ccw(c82.16,57.141) 82.16,58.674 ccw(c82.16,60.207) Y1.2@83.244,59.123 ; Y1.2@83.424,58.405 ccw(c82.773,57.754) 82.773,58.674 ccw(c82.773,59.594) Y1.2@83.424,58.943
pads on no net: 1.3 ?.0 AT89S52/STC89C52.29 AT89S52/STC89C52.30 COM1.1 COM1.4 COM1.6 COM1.7 COM1.8 COM1.9 COM1.10 COM1.11 KEY1.3 KEY1.4 MAX232.7 MAX232.8 MAX232.9 MAX232.10

## Polygon pours and split planes (outlines as drawn)
no net on Top Layer (hatched 45Degree grid 0.508 track 0.203): 40.513,42.164 38.227,44.45 38.227,158.242 40.513,160.528 129.54,160.528 131.191,158.877 131.191,44.704 128.651,42.164

## Keep-outs
Keep-Out Layer:
  lines w0.254: 37.719,44.196 37.719,157.607 37.719,158.496 40.259,161.036 171.958,161.036 172.339,161.036 174.879,158.496 174.879,47.371 174.879,44.196 172.339,41.656 40.259,41.656 37.719,44.196

## Silkscreen, mask and mechanical layers (free items; w line width, h text height)
Top Overlay:
  lines w0.254: 170.053,54.737 172.212,54.737 172.212,51.181 ; 170.053,112.649 172.212,112.649 172.212,109.093 ; 170.053,141.732 172.212,141.732 172.212,138.176 ; 170.18,69.723 172.339,69.723 172.339,66.167 ; 170.18,83.566 172.339,83.566 172.339,80.01 ; 170.18,155.702 172.339,155.702 172.339,152.146 ; 170.307,47.371 172.212,47.371 172.212,49.784 173.482,51.308 ; 170.307,97.79 172.466,97.79 172.466,94.234 ; 170.307,105.283 172.212,105.283 172.212,107.696 173.482,109.22 ; 170.307,126.746 172.466,126.746 172.466,123.19 ; 170.307,134.366 172.212,134.366 172.212,136.779 173.482,138.303 ; 170.434,62.357 172.339,62.357 172.339,64.77 173.609,66.294 ; 170.434,76.2 172.339,76.2 172.339,78.613 173.609,80.137 ; 170.434,148.336 172.339,148.336 172.339,150.749 173.609,152.273 ; 170.561,90.424 172.466,90.424 172.466,92.837 173.736,94.361 ; 170.561,119.38 172.466,119.38 172.466,121.793 173.736,123.317
  text "VCC" at 40.513,150.749 h1.52 r90
  text "DOWNLOAD" at 84.963,145.796 h1.02
  text "GND" at 40.513,142.367 h1.52 r90
  text "IN0" at 38.862,125.73 h1.02
  text "IN1" at 38.862,120.745 h1.02
  text "IN2" at 38.862,115.76 h1.02
  text "IN3" at 38.862,110.776 h1.02
  text "IN4" at 38.862,105.791 h1.02
  text "IN5" at 38.862,100.806 h1.02
  text "IN6" at 38.862,95.822 h1.02
  text "IN7" at 38.862,90.837 h1.02
  text "GND" at 38.862,85.598 h1.02
Bottom Solder:
  lines w2.5: 146.558,54.483 160.782,54.483 161.671,53.594 ; 146.558,68.979 160.746,68.979 161.671,68.054 ; 146.558,83.475 160.709,83.475 161.671,82.514 ; 146.558,97.971 160.673,97.971 161.671,96.974 ; 146.558,112.468 160.637,112.468 161.671,111.433 ; 146.558,126.964 160.601,126.964 161.671,125.893 ; 146.558,141.46 160.564,141.46 161.671,140.353 ; 146.558,155.956 160.528,155.956 161.671,154.813 ; 150.114,46.609 159.766,46.609 161.671,48.514 ; 150.114,61.105 159.802,61.105 161.671,62.974 ; 150.114,75.601 159.839,75.601 161.671,77.434 ; 150.114,90.097 159.875,90.097 161.671,91.894 ; 150.114,104.594 159.911,104.594 161.671,106.353 ; 150.114,119.09 159.947,119.09 161.671,120.813 ; 150.114,133.586 159.984,133.586 161.671,135.273 ; 150.114,148.082 160.02,148.082 161.671,149.733
Mechanical 1:
  lines w0.254: 34.925,43.053 35.433,41.529 ; 34.925,159.766 35.433,161.29 ; 35.179,41.529 35.687,41.529 ; 35.179,161.29 35.687,161.29 ; 35.433,93.005 35.433,41.529 ; 35.433,109.814 35.433,161.29 ; 35.941,43.053 35.433,41.529 ; 35.941,159.766 35.433,161.29 ; 37.591,162.429 37.591,162.937 ; 39.115,162.175 37.591,162.683 ; 39.115,163.191 37.591,162.683 ; 96.814,162.685 37.591,162.683 ; 115.655,162.685 174.879,162.687 ; 173.355,162.179 174.879,162.687 ; 173.355,163.195 174.879,162.687 ; 174.879,162.433 174.879,162.941 ; 37.719,44.196 37.719,158.496 40.259,161.036 172.339,161.036 174.752,158.623 174.879,158.623 174.879,44.196 172.339,41.656 40.259,41.656 37.719,44.196
  text "137.2884 (mm)" at 97.068,161.77 h1.52
  text "119.761 (mm)" at 36.347,93.259 h1.52 r90

## Text inside footprints (layer, text, board x,y; h text height)
1: Top Overlay "2" at 80.899,153.289 h1.02; Top Overlay "9" at 95.123,150.749 h1.02; Top Overlay "10" at 95.123,153.289 h1.02
COM1: Top Overlay "6" at 42.821,59.353 h1.02 r90; Top Overlay "9" at 42.821,67.663 h1.02 r90; Top Overlay "5" at 49.149,71.628 h1.02 r90; Top Overlay "1" at 49.022,56.007 h1.02 r90